# EAGLE board spin (EAGLE 6.3)
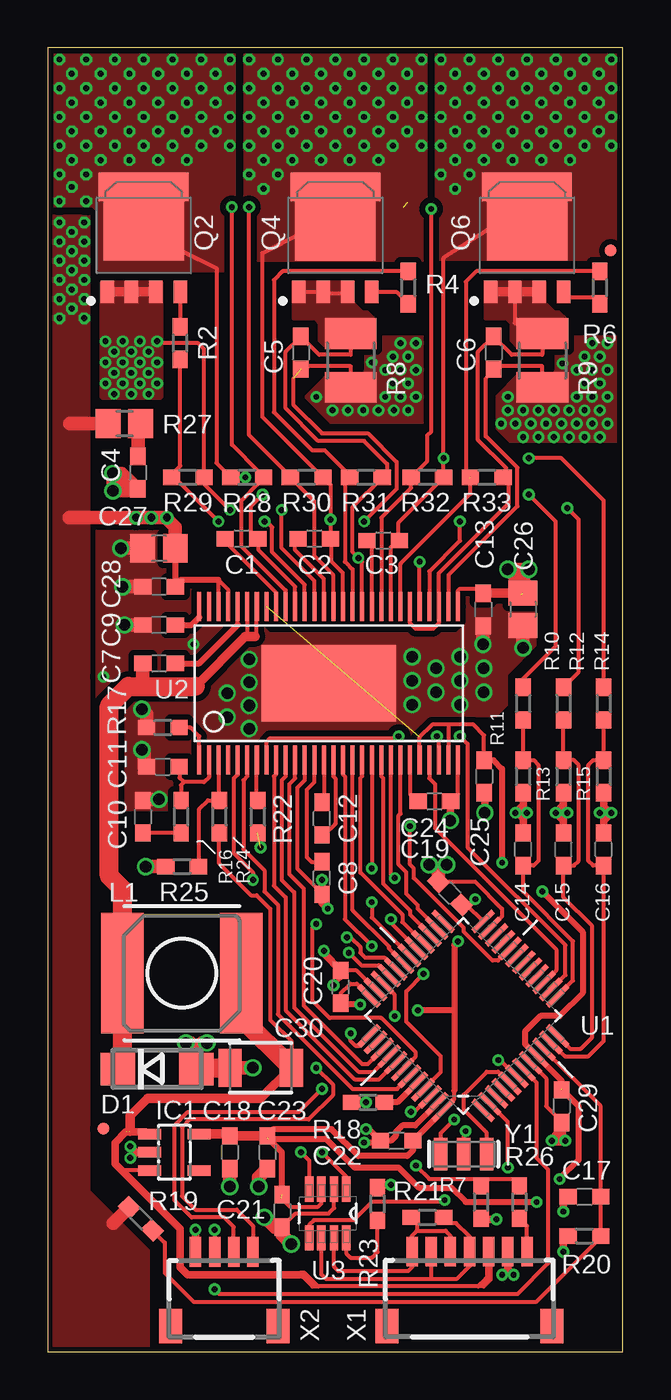
[diagram p0: board, top side]
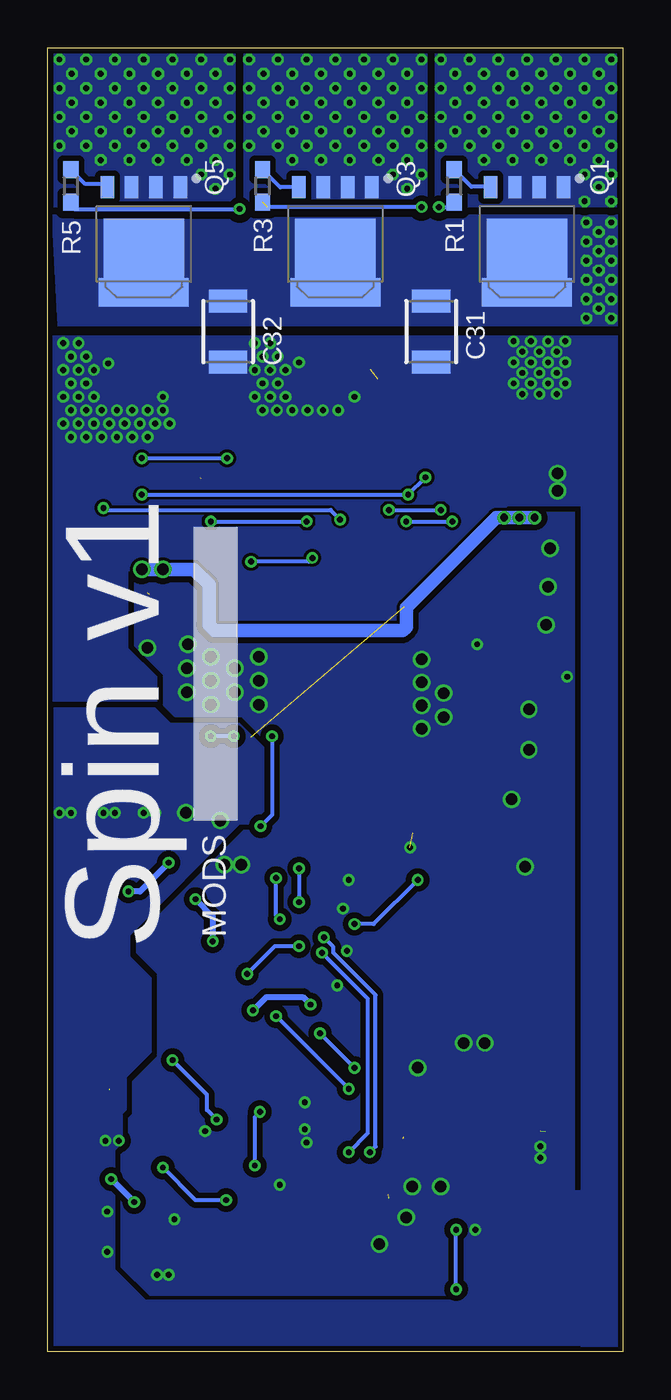
[diagram p1: board, bottom side, seen from below]

Size 30 x 68 mm. Coordinates in mm from the lower left corner, seen from the top.
Outline: 0,0 30,0 30,68 0,68 0,0
Copper layers (1*16): Top 0.035mm / dielectric 1.5mm / Bottom 0.035mm
Design rules "Fusion_eagle_rule_v1.1 *": minimum track width 6mil, minimum drill 12mil, track to track 6mil, track to pad 6mil, pad to pad 6mil, via to via 6mil, smd to smd 0mil, copper to edge 10mil, drill to drill 10mil, minimum pad ring 10mil, minimum via ring 6mil, stop-mask expansion 2mil, vias tented up to drill 100mil, thermal gap 10mil
Net classes: 1 HVPWR: clearance 0.4 mm
tRestrict: area 12.3,46.2 to 20.1,52.3; area 22.2,46.2 to 30,52.3
bRestrict: area 16.1,42.9 to 21.9,43.8; area 9.1,43.4 to 12.7,44.4

## Footprints (pad centres in the part's own frame; a part is rotated, then mirrored left to right if it is on the bottom)
C0603 = smd 0.9 x 0.8: 1 -0.85,0; 2 0.85,0
C0805 = smd 1.3 x 1.5: 1 -0.85,0; 2 0.85,0
1210 = smd 1.2 x 2: 1 -1.6,0; 2 1.6,0
SMA = smd 1.8 x 1.7: A 2.05,0; C -2.05,0
SOT23-5L = smd 0.55 x 1.2: 1 -0.95,-1.3; 2 0,-1.3; 3 0.95,-1.3; 4 0.95,1.3; 5 -0.95,1.3
MICRO-FIDUCIAL = smd 0.635 x 0.635: 1 0,0
NR6028 = smd 6.3 x 2.2: 1 0,3.1; 2 0,-3.1
POWER-SO8-UNIVERSAL = smd 1.15 x 0.7: 1 -2.725,1.905; 2 -2.725,0.635; 3 -2.725,-0.635; 4 -2.725,-1.905 | smd 3.6 x 4.2: 5 0.7,0 | smd 1.5 x 4.7: 6 2.75,0
R0603 = smd 0.9 x 0.8: 1 -0.85,0; 2 0.85,0
R1210 = smd 1.6 x 2.7: 1 -1.4,0; 2 1.4,0
R0805 = smd 1.3 x 1.5: 1 -0.85,0; 2 0.85,0
QFP50P900X900X160-48N = smd 1.473 x 0.279: 1 -4.216,2.743; 2 -4.216,2.261; 3 -4.216,1.753; 4 -4.216,1.245; 5 -4.216,0.762; 6 -4.216,0.254; 7 -4.216,-0.254; 8 -4.216,-0.762; 9 -4.216,-1.245; 10 -4.216,-1.753; 11 -4.216,-2.261; 12 -4.216,-2.743; 25 4.216,-2.743; 26 4.216,-2.261; 27 4.216,-1.753; 28 4.216,-1.245; 29 4.216,-0.762; 30 4.216,-0.254; 31 4.216,0.254; 32 4.216,0.762; 33 4.216,1.245; 34 4.216,1.753; 35 4.216,2.261; 36 4.216,2.743 | smd 0.279 x 1.473: 13 -2.743,-4.216; 14 -2.261,-4.216; 15 -1.753,-4.216; 16 -1.245,-4.216; 17 -0.762,-4.216; 18 -0.254,-4.216; 19 0.254,-4.216; 20 0.762,-4.216; 21 1.245,-4.216; 22 1.753,-4.216; 23 2.261,-4.216; 24 2.743,-4.216; 37 2.743,4.216; 38 2.261,4.216; 39 1.753,4.216; 40 1.245,4.216; 41 0.762,4.216; 42 0.254,4.216; 43 -0.254,4.216; 44 -0.762,4.216; 45 -1.245,4.216; 46 -1.753,4.216; 47 -2.261,4.216; 48 -2.743,4.216
TSSOP56P = smd 1.5 x 0.21: 1 -4,6.75; 2 -4,6.25; 3 -4,5.75; 4 -4,5.25; 5 -4,4.75; 6 -4,4.25; 7 -4,3.75; 8 -4,3.25; 9 -4,2.75; 10 -4,2.25; 11 -4,1.75; 12 -4,1.25; 13 -4,0.75; 14 -4,0.25; 15 -4,-0.25; 16 -4,-0.75; 17 -4,-1.25; 18 -4,-1.75; 19 -4,-2.25; 20 -4,-2.75; 21 -4,-3.25; 22 -4,-3.75; 23 -4,-4.25; 24 -4,-4.75; 25 -4,-5.25; 26 -4,-5.75; 27 -4,-6.25; 28 -4,-6.75; 29 4,-6.75; 30 4,-6.25; 31 4,-5.75; 32 4,-5.25; 33 4,-4.75; 34 4,-4.25; 35 4,-3.75; 36 4,-3.25; 37 4,-2.75; 38 4,-2.25; 39 4,-1.75; 40 4,-1.25; 41 4,-0.75; 42 4,-0.25; 43 4,0.25; 44 4,0.75; 45 4,1.25; 46 4,1.75; 47 4,2.25; 48 4,2.75; 49 4,3.25; 50 4,3.75; 51 4,4.25; 52 4,4.75; 53 4,5.25; 54 4,5.75; 55 4,6.25; 56 4,6.75 | smd 4 x 7: 57 0,0
SOT65P280X145-8N = smd 1.321 x 0.432: 1 -1.27,0.965; 2 -1.27,0.33; 3 -1.27,-0.33; 4 -1.27,-0.965; 5 1.27,-0.965; 6 1.27,-0.33; 7 1.27,0.33; 8 1.27,0.965
SM07B-SRSS-TB = smd 0.6 x 1.55: 1 -3,2.975; 2 -2,2.975; 3 -1,2.975; 4 0,2.975; 5 1,2.975; 6 2,2.975; 7 3,2.975 | smd 1.2 x 1.8: FIT@1 -4.3,-0.9; FIT@2 4.3,-0.9
SM04B-SRSS-TB = smd 0.6 x 1.55: 1 -1.5,2.975; 2 -0.5,2.975; 3 0.5,2.975; 4 1.5,2.975 | smd 1.2 x 1.8: FIT@1 -2.8,-0.9; FIT@2 2.8,-0.9
RESONATOR-SMD = smd 0.7 x 1.7: 1 -1.2,0; 2 0,0; 3 1.2,0

## Placement (x,y rotation side)
C1  100n  [C0603]  10.1,42.4 0 top
C2  100n  [C0603]  13.9,42.4 0 top
C3  100n  [C0603]  17.5,42.3 0 top
C4  10n  [C0603]  4.7,45.85 270 top
C5  1n  [C0603]  13.2,52.1 270 top
C6  1n  [C0603]  23.25,52.1 270 top
C7  100n  [C0603]  5.8,35.9 180 top
C8  2u2  [C0603]  14.3,24.7 90 top
C9  15n  [C0603]  5.8,37.9 180 top
C10  6n8  [C0603]  4.95,27.9 270 top
C11  120p  [C0603]  6,30.5 0 top
C12  22n  [C0603]  14.3,27.8 90 top
C13  100n  [C0603]  22.71,38.7 270 top
C14  2n2  [C0603]  24.8,26.2 90 top
C15  2n2  [C0603]  26.9,26.2 90 top
C16  2n2  [C0603]  29,26.2 90 top
C17  100n  [C0603]  28,8.08 180 top
C18  2u2  [C0603]  9.49,10.4 270 top
C19  100n  [C0603]  20.98,23.91 135 top
C20  100n  [C0603]  15.28,19.03 90 top
C21  100n  [C0603]  12.22,7.34 270 top
C22  100n  [C0603]  18.2,11 180 top
C23  100n  [C0603]  11.45,10.4 270 top
C24  1u  [C0603]  20.17,28.7 180 top
C25  1u  [C0603]  22.76,30 270 top
C26  4u7  [C0805]  24.79,38.72 270 top
C27  4u7  [C0805]  5.8,41.9 180 top
C28  100n  [C0603]  5.8,39.9 180 top
C29  1u  [C0603]  26.8,12.8 270 top
C30  47u  [1210]  11.1,14.8 180 top
C31  10u  [1210]  10,53.2 270 bottom
C32  10u  [1210]  20.6,53.2 270 bottom
D1  STPS1H100AF  [SMA]  5.7,14.73 0 top
IC1  MCP1824MCP1824T-3302E/OT  [SOT23-5L]  6.6,10.4 270 top
JP1  FIDUCIALUFIDUCIAL  [MICRO-FIDUCIAL]  2.9,11.63 0 top
JP2  FIDUCIALUFIDUCIAL  [MICRO-FIDUCIAL]  29.36,57.43 0 top
L1  10u  [NR6028]  6.99,19.74 90 top
Q1  PSMN7R0-60YS  [POWER-SO8-UNIVERSAL]  5,58 270 bottom
Q2  PSMN7R0-60YS  [POWER-SO8-UNIVERSAL]  5,58 90 top
Q3  PSMN7R0-60YS  [POWER-SO8-UNIVERSAL]  15,58 270 bottom
Q4  PSMN7R0-60YS  [POWER-SO8-UNIVERSAL]  15,58 90 top
Q5  PSMN7R0-60YS  [POWER-SO8-UNIVERSAL]  25,58 270 bottom
Q6  PSMN7R0-60YS  [POWER-SO8-UNIVERSAL]  25,58 90 top
R1  10R  [R0603]  8.8,60.8 90 bottom
R2  10R  [R0603]  6.9,52.6 90 top
R3  10R  [R0603]  18.8,60.8 90 bottom
R4  10R  [R0603]  18.8,55.5 270 top
R5  10R  [R0603]  28.8,60.8 90 bottom
R6  10R  [R0603]  28.8,55.5 270 top
R7  2K2  [R0603]  22.6,7.8 90 top
R8  R001  [R1210]  15.8,51.7 270 top
R9  R001  [R1210]  25.8,51.7 270 top
R10  56K  [R0603]  24.8,33.8 270 top
R11  3K9  [R0603]  24.8,30 90 top
R12  56K  [R0603]  26.9,33.8 270 top
R13  3K9  [R0603]  26.9,30 90 top
R14  56K  [R0603]  29,33.8 270 top
R15  3K9  [R0603]  29,30 90 top
R16  10K  [R0603]  6.95,27.9 270 top
R17  205K  [R0603]  6,32.55 180 top
R18  10K  [R0603]  16.7,13 180 top
R19  56K  [R0603]  4.85,6.93 135 top
R20  3K9  [R0603]  28,6.03 0 top
R21  DNF  [R0603]  19.8,7 0 top
R22  0R  [R0603]  10.95,27.9 270 top
R23  0R  [R0603]  17.2,7.7 90 top
R24  53K6  [R0603]  8.95,27.9 90 top
R25  10K  [R0603]  7,25.3 0 top
R26  1K8  [R0603]  24.6,7.8 270 top
R27  3R3  [R0805]  4,48.4 180 top
R28  100K  [R0603]  10.4,45.6 0 top
R29  100K  [R0603]  7.3,45.6 180 top
R30  100K  [R0603]  13.5,45.6 180 top
R31  100K  [R0603]  16.6,45.6 180 top
R32  100K  [R0603]  19.8,45.6 180 top
R33  100K  [R0603]  22.9,45.6 180 top
U1  STM32F103CBT6  [QFP50P900X900X160-48N]  21.67,17.51 135 top
U2  DRV8301DCA  [TSSOP56P]  14.65,34.86 90 top
U3  MAX3051EKA  [SOT65P280X145-8N]  14.6,7.2 270 top
X1  SM07B-SRSS-TB  [SM07B-SRSS-TB]  22,2.24 0 top
X2  SM04B-SRSS-TB  [SM04B-SRSS-TB]  9.2,2.23 0 top
Y1  RESONATORSMD  [RESONATOR-SMD]  21.7,10.3 0 top

## Library data of the parts
C1-C29 D1 IC1 JP1 JP2 L1 Q1-Q6 R1-R33 U2 X1 X2 Y1 = FOC ESC
C30-C32 = SparkFun
U1 = FOC ESC; MPN: STM32F103CBT6; OC_FARNELL: 1606327; OC_NEWARK: 11N8296; PACKAGE: QFP-48; SUPPLIER: STMICROELECTRONICS
U3 = FOC ESC; MPN: MAX3051EKA; OC_FARNELL: -; OC_NEWARK: 07R7042; PACKAGE: SOT-23-8; SUPPLIER: Maxim

## Nets
+3V3: C18.1 C19.1 C20.1 C21.1 C22.1 C23.1 C25.1 C29.1 IC1.5 U1.9 U1.24 U1.36 U1.48 U2.24 U2.27 U2.49 U3.3
+5V: C30.1 IC1.1 IC1.3 L1.2 R24.1 X1.5
A_HI: U1.31 U2.17
A_LO: U1.28 U2.18
B_HI: U1.30 U2.19
B_LO: U1.27 U2.20
C_HI: U1.29 U2.21
C_LO: U1.26 U2.22
CAN_H: R21.1 U3.7 X1.1 X1.3
CAN_L: R21.2 U3.6 X1.2 X1.4
CAN_RX: U1.32 U3.4
CAN_SHDN: U1.2 U3.5
CAN_TX: U1.33 U3.1
GND: C8.1 C9.2 C10.1 C11.1 C13.2 C18.2 C19.2 C20.2 C21.2 C22.2 C23.2 C26.2 C27.2 C28.2 C30.2 D1.A IC1.2 R7.1 R17.2 R18.2 R22.2 R23.2 R25.1 U1.23 U1.35 U1.47 U2.12 U2.57 U3.2 X1.6 X2.1 Y1.2
GNDA: C14.2 C15.2 C16.2 C17.2 C24.1 C25.2 C29.2 R11.1 R13.1 R15.1 R20.1 U1.8 U2.28
I_B_SENSE: U1.15 U2.25
I_C_SENSE: U1.14 U2.26
N$1: Q1.4 R1.2
N$2: Q2.4 R2.2
N$3: Q3.4 R3.2
N$5: Q6.4 R6.2
N$6: Q5.4 R5.2
N$7: C3.2 Q5.1 Q5.2 Q5.3 Q6.5 Q6.6 R14.1 R32.1 U2.36
N$8: C2.2 Q3.1 Q3.2 Q3.3 Q4.5 Q4.6 R12.1 R30.1 U2.41
N$9: C1.2 Q1.1 Q1.2 Q1.3 Q2.5 Q2.6 R10.1 R28.1 U2.46
N$10: R4.1 R31.2 U2.40
N$11: R3.1 R30.2 U2.42
N$12: R5.1 R32.2 U2.37
N$13: R6.1 R33.2 U2.35
N$16: R1.1 R28.2 U2.47
N$17: C7.1 U2.52
N$18: R2.1 R29.2 U2.45
N$19: R26.2 X1.7
N$20: C7.2 D1.C L1.1 U2.50 U2.51
N$21: C1.1 U2.48
N$22: C2.1 U2.43
N$23: C3.1 U2.38
N$25: C11.2 R16.1 U2.2
N$26: R17.1 U2.1
N$28: R18.1 U1.44
N$29: C8.2 U2.13
N$31: R23.1 U3.8
N$32: C12.2 U2.14
N$33: C12.1 U2.15
N$34: C10.2 R16.2
N$35: C24.2 U2.23
N$36: U1.39 U2.11
N$37: C9.1 U2.56
N$38: R22.1 U2.7
N$39: R24.2 R25.2 U2.3
N$40: U1.40 U2.10
N$41: U1.41 U2.9
N$42: U1.42 U2.5
N$43: U1.43 U2.6
N$44: U1.45 U2.16
N$130: U1.6 Y1.1
N$131: U1.5 Y1.3
N$132: C4.1 R27.1
NRST: U1.7 X2.2
PGND: C4.2 C5.2 C6.2 C31.2 C32.2 Q2.1 Q2.2 Q2.3 R8.2 R9.2 R29.1 U2.30 U2.32 U2.44
PWM_IN: R7.2 R26.1 U1.46
PWR [HVPWR]: C13.1 C26.1 C27.1 C28.1 C31.1 C32.1 Q1.5 Q1.6 Q3.5 Q3.6 Q5.5 Q5.6 R19.2 R27.2 U2.29 U2.53 U2.54
Q4: Q4.4 R4.2
SN1: C5.1 Q4.1 Q4.2 Q4.3 R8.1 R31.1 U2.33 U2.39
SN2: C6.1 Q6.1 Q6.2 Q6.3 R9.1 R33.1 U2.31 U2.34
SPI_!CS: U1.20 U2.8
SWDCLK: U1.37 X2.4
SWDIO: U1.34 X2.3
V_A_SENSE: C14.1 R10.2 R11.2 U1.13
V_B_SENSE: C15.1 R12.2 R13.2 U1.12
V_BUS_SENSE: C17.1 R19.1 R20.2 U1.10
V_C_SENSE: C16.1 R14.2 R15.2 U1.11

## Tracks (layer width: path | path; a pad name or v marks a point on that pad's centre or on a via)
+3V3  (via drill 0.3 pad 0.15)  (4 unrouted)
  Top 0.2: U2.24 19.4,32.05 20.05,32.7 20.9,32.7 | 20.9,32.7 U2.27 | C25.1 22.76,32.15 22.21,32.7 20.9,32.7 | U1.24 21.83,23.31 C19.1 | 12.2,8 12.64,7.56 14.1,7.56 14.27,7.73 U3.3 | 20.63,12.58 U1.48 21.2,13.16 21.2,13.6 | C20.1 15.28,18.68 15.78,19.18 16.12,19.18 U1.36
  Top 0.3: C29.1 26.8,14.14 U1.9 24.9,16.04 24.9,16.7 25.7,17.5 26.7,17.5 27.9,18.7 27.9,21.9 v25.8,24 | C21.1 12.2,8.25 12.2,10.42 11.45,11.17 C23.1 11.75,11.6 14.8,11.6 16.2,10.2 18.75,10.2 19.05,10.5 C22.1 20.63,12.58 | v21.4,21.4 21.2,21.2 21.2,17.8 | 21.2,17.8 21.2,13.6 | C25.1 23.25,30.85 23.7,30.4 v23.7,25.5 | 21.2,17.8 v19.3,17.8 | v16.3,18.1 15.36,18.1 C20.1 | 11.5,11.1 14.5,11.1 16,9.6 18.3,9.6 19.35,8.55 21.05,8.55 21.8,7.8 v25.5,7.8 | v26.7,9 27.7,10 27.7,12.8 26.8,13.7 | v22.3,23.6 22.01,23.31 C19.1
  Top 0.5: IC1.5 9.35,11.35 C18.1 C23.1
  Bottom 0.3: v22.3,23.6 21.4,22.7 v21.4,21.4 | v19.3,17.8 18.6,18.5 16.7,18.5 v16.3,18.1 | v25.5,7.8 v26.7,9 | v23.7,25.5 25.2,24 v25.8,24
+5V  (1 unrouted)
  Top 0.2: R24.1 8.91,26.99 8.91,25.49 10.6,23.8 10.9,23.8 11.6,23.1 11.6,17.3 12.7,16.2 C30.1 | 23,3.8 22.85,3.8 22.45,3.4 | 22.45,3.4 14.1,3.4 | 14.1,3.4 14,3.4 | 14,3.4 13.9,3.4 | 13.9,3.4 13.3,4 | 13.9,3.4 13.8,3.4 13.3,3.9 | 13.7,3.7 14,3.4 | 14.1,3.4 13.4,4.1 13.15,4.1 | 22.45,3.4 22.75,3.4 23.1,3.75 22.7,3.5 | 4.3,11.5 4.4,11.4 | IC1.3 3.95,9.45 3.9,9.4
  Top 0.4: X1.5 23,3.8 | 13.3,4 7.3,4 6.9,4.4 6.9,6.4 3.9,9.4 3.5,9.8 3.5,10.9 4.05,11.45 5.1,11.45 IC1.1
  Top 0.5: C30.1 11.1,13.2 5.2,13.2 4.3,12.3 4.3,11.5
  Top 1: C30.1 10.09,17.41 L1.2
A_HI
  Top 0.2: U1.31 17.8,21.02 17.8,21.12 15.9,23.02 U2.17
A_LO
  Top 0.2: U2.18 16.4,30 16.3,29.9 16.3,24.99 18.5,22.79 18.5,22.4 19.53,21.37 U1.28
B_HI  (via drill 0.3 pad 0.15)
  Top 0.2: U2.19 v16.9,25.2 | v16.9,23.44 16.9,22.64 U1.30
  Bottom 0.2: v16.9,25.2 v16.9,23.44
B_LO
  Top 0.2: U2.20 17.4,30 17.5,29.9 17.5,24.4 18.9,23 18.9,22.8 19.93,21.77 U1.27
C_HI  (via drill 0.3 pad 0.15)
  Top 0.2: U1.29 17.9,22.36 v17.9,22.56 | v18.1,24.7 17.9,24.9 U2.21
  Bottom 0.2: v18.1,24.7 18.1,22.76 v17.9,22.56
C_LO
  Top 0.2: U2.22 18.4,28.06 18.3,27.96 18.3,25.4 18.7,25 18.7,23.88 19.3,23.28 19.3,23.1 20.29,22.11 U1.26
CAN_H
  Top 0.2: 19.25,6.3 19,6.05 X1.1 19,4.4 18.8,4.2 15.15,4.2 14.93,4.42 U3.7 | 19.25,6.3 19.25,6.7 18.9,6.95 arc-90 R21.1 | 19.25,6.3 20.75,6.3 21,6.05 X1.3
CAN_L
  Top 0.2: 20,3.8 14.49,3.8 14.27,4.02 U3.6 | 20,3.8 21.35,3.8 22,4.45 X1.4 22,6 21.3,6.7 21,6.7 20.7,7 R21.2 | 20,3.8 X1.2
CAN_RX  (via drill 0.3 pad 0.15)
  Top 0.2: v13.2,10.4 13.63,9.96 U3.4 | v15.6,21.6 15.8,21.6 16.3,21.1 16.3,20.8 16.55,20.55 17.55,20.55 U1.32
  Bottom 0.2: v13.2,10.4 12.9,10.7 12.9,18.6 15.1,20.8 15.1,21.1 v15.6,21.6
CAN_SHDN  (via drill 0.3 pad 0.15)
  Top 0.2: U3.5 13.63,6.6 13.88,6.85 15.95,6.85 16.9,7.8 20.6,7.8 v20.7,7.9 | v24,9.6 24,11.98 U1.2
  Bottom 0.2: v20.7,7.9 22.3,7.9 v24,9.6
CAN_TX  (via drill 0.3 pad 0.15)
  Top 0.2: U3.1 15.56,9.13 v14.3,10.4 | v15.7,20.8 16.35,20.15 17.27,20.15 U1.33
  Bottom 0.2: v14.3,10.4 13.3,11.4 13.3,18.4 v15.7,20.8
GND  (via drill 0.3, 0.3 pad 0.15, 0.6 pad 0.15)  (1 unrouted)
  Top 0.2: 23.05,22.15 U1.23 23.09,22.09 23.7,22.7 23.7,23.1 22.29,24.51 C19.2 | 5.01,30.47 C11.1 | 5.08,29.1 4.93,28.85 C10.1 | U2.12 13.4,29.8 13,29.4 13,25.21 14.3,23.91 C8.1 | U1.35 16.1,19.88 C20.2 15.28,19.48 v14.9,19.1 | C21.2 12.92,7.2 14.64,7.2 14.93,7.49 U3.2 | R18.2 v16.6,13 | C22.2 17.15,10.9 | Y1.2 21.7,11.4 v21.8,11.5 | 14.4,20.76 v14.4,20.9
  Top 0.3: U1.47 19.16,11.8 18.5,11.8 18.15,11.45 18.15,11.25 17.9,11 C22.2 16.65,11.7 v16.6,11.6 | 17.15,10.9 v16.5,10.9
  Top 0.4: C20.2 14.4,20.76 | 4.6,10.4 v4.3,10.1 | IC1.2 4.6,10.4 | 4.6,10.4 v4.3,10.7 | 7.7,4.91 X2.1 v7.7,6.35 | 24,4.3 v24.3,4 | X1.6 24,4.3 | 24,4.3 v23.7,4 | R7.1 22.65,6.9 v23.4,6.9 | R23.2 17.55,8.7 v17.9,8.7 | v14.3,24.6 C8.1 14.3,23.4 v14.6,23.1
  Top 0.5: C13.2 22.73,37.87
  Top 0.7: 7.75,15.8 7.45,16.1 v7.2,16.1 | 7.75,15.8 D1.A 7.82,14.8 C30.2 v10.7,14.8 | 7.75,15.8 8.05,16.1 v8.3,16.1 | C19.2 20.38,25.2 | 20.38,25.2 19.88,25.4 v19.9,25.4 | 20.38,25.2 20.78,25.3 v20.8,25.4 | C18.2 v9.49,8.61 v9.5,8.6 | C23.2 11,9.1 v11,8.6 | v12.7,5.6 12.22,6.08 C21.2 11.86,6.49 v11.3,7 | C10.1 5,28.8 v5.8,28.8 | 5.01,30.47 5.01,31.29 v4.9,31.4 | R17.2 5.15,33.25 v4.9,33.5 | C9.2 v4,37.9 | v3.9,39.9 C28.2 | C13.2 v22.71,36.91 v22.7,36.9 | C26.2 v24.79,36.71 v24.8,36.7 | R25.1 v5.1,25.3 | v3.8,41.9 C27.2
  Top 1: D1.A 7.78,14.8 C30.2
  other vias: 11.1,26.3 19,36.25 19,35 19,33.75 20.25,34.4 20.25,35.65 21.5,36.25 21.5,35 21.5,33.75 10.5,33.7 10.5,34.9 10.5,36.1 9.35,34.35 9.35,33.1 22.75,34.4 22.75,35.65 10.5,32.5 7.6,36.9 2.9,35.2
  pour Bottom (isolate 0.3): 2.5,43.8 2.5,8.4 0.2,8.4 0.2,2.9 24.7,2.9 26.2,4.4 26.2,10.3 25.8,10.7 25.8,12.2 25.6,12.4 25.6,14.1 24.3,15.4 24.3,19.7 25.4,20.8 25.4,21.6 19.8,27.2 19.2,27.2 18.5,27.9 18.5,31.7 19.9,33.1 23.4,33.1 24,33.7 24,35.3 25.5,36.8 25.5,40.7 22.5,40.7 21.7,39.9 21.7,37.9 21.3,37.5 11.6,37.5 11.2,37.9 11.2,38.9 6.2,43.8
  pour Top (isolate 0.3, no thermals): 2.5,43.8 2.5,28.2 18.5,28.2 18.5,31.7 19.9,33.1 23.4,33.1 24,33.7 24,35.3 25.5,36.8 25.5,40.7 22.5,40.7 21.7,39.9 21.7,37.9 21.3,37.5 11.6,37.5 11.2,37.9 11.2,38.9 6.2,43.8
GNDA  (via drill 0.3 pad 0.15, 0.6 pad 0.15)
  Top 0.2: U1.8 26,14.26 26,12.8 26.8,12 C29.2 | C24.1 21.4,29.08 U2.28 | R11.1 C14.2 | C15.2 26.9,27.1 R13.1 | C16.2 29,29.1 R15.1
  Top 0.4: C17.2 26.9,7.73 v26.9,7.3 | R20.1 26.9,5.78 v26.9,5.2 | 24.8,28.5 24.8,28.3 v25,28.1 24.8,27.9 C14.2 24.8,27.8 24.5,28.1 v24.4,28.1 24.8,28.5 | 24.8,28.5 24.8,29.2 | 26.9,27.7 v26.5,28.1 26.9,28.5 R13.1 26.9,28.3 v27.1,28.1 26.9,27.9 26.9,27.7 | 26.9,27.7 26.9,27.1 | 29,28.4 29,28.3 v28.8,28.1 29,27.9 C16.2 29,27.7 v29.4,28.1 29.3,28.1 29,28.4 | 29,29.1 29,28.4 | v21,27.7 21,28.68 C24.1 | v22.8,28.1 22.8,29.09 C25.2
  Top 0.5: C29.2 26.8,11.3 v27,11 v26.3,11 26.7,11.4 26.7,11.9
  pour Bottom (isolate 0.3): 29.8,33.6 24.4,33.6 23.6,32.8 20,32.8 18.7,31.5 18.7,28.1 19.3,27.5 20,27.5 25.7,21.7 25.7,20.6 24.6,19.5 24.6,15.6 25.9,14.3 25.9,12.6 26.1,12.4 26.1,10.9 26.5,10.5 26.5,4.3 24.9,2.7 8.6,2.7 8.4,2.9 0.2,2.9 0.2,0.2 29.8,0.2
I_B_SENSE
  Top 0.2: U2.25 19.9,29.9 20.2,29.6 20.2,27.3 26.55,20.95 26.55,19.91 U1.15
I_C_SENSE  (via drill 0.3 pad 0.15)
  Top 0.2: U2.26 20.4,32 v20.3,32.1 | v21.5,32.1 21.9,31.7 21.9,26.3 27,21.2 27,19.64 U1.14
  Bottom 0.2: v20.3,32.1 v21.5,32.1
N$1
  Bottom 0.2: 8.8,61.7 R1.2 7.9,60.75 6.93,60.75
  Bottom 0.7: Q1.4 6.93,60.75
N$2
  Top 0.2: Q2.4 R2.2
N$3
  Bottom 0.2: 18.77,61.62 R3.2 17.88,60.73 Q3.4
N$5
  Top 0.2: Q6.4 26.9,55 28.45,55 R6.2
N$6
  Bottom 0.2: 26.91,60.9 28.05,60.9 R5.2
  Bottom 0.7: Q5.4 26.91,60.9
N$7  (via drill 0.3 pad 0.15, 0.3 pad 0.3)
  Top 0.2: U2.36 17.9,41.95 18.2,42.25 C3.2 18.3,42.35 18.3,43.25 R32.1 v20.65,46.6 20.65,57.05 23.4,58.8 24.9,58.8 Q6.5 | R14.1 29,44.4 26.8,46.6 v25.1,46.6
  Bottom 0.2: v25.1,46.6 v20.65,46.6
  other vias: 21.25,62.15 20.5,62.9 21.25,63.65 20.5,64.4 22,64.4 23.5,64.4 22.75,63.65 22.75,62.15 25,64.4 22,62.9 24.25,62.15 25,62.9 23.5,62.9 24.25,63.65 29.4,64.4 29.4,62.9 28.75,63.65 28,64.4 28,62.9 27.25,62.15 25.75,62.15 26.5,62.9 27.25,63.65 26.5,64.4 25.75,63.65 20.5,61.4 22,61.4 21.25,60.65 21.25,66.65 20.5,67.4 22,67.4 22.75,66.65 23.5,67.4 24.25,66.65 25,67.4 29.4,67.4 28.75,66.65 25.75,66.65 27.25,66.65 26.5,67.4 28,67.4 21.25,65.15 20.5,65.9 22,65.9 22.75,65.15 23.5,65.9 24.25,65.15 25,65.9 29.4,65.9 28.75,65.15 25.75,65.15 27.25,65.15 26.5,65.9 28,65.9
  pour Top (isolate 0.3, no thermals): 20.2,56.9 29.8,56.9 29.8,67.8 20.2,67.8
  pour Bottom (isolate 0.3, no thermals): 20.2,59.7 29.8,59.7 29.8,67.8 20.2,67.8
N$8  (via drill 0.3 pad 0.15, 0.3 pad 0.3)
  Top 0.2: U2.41 15.39,40.61 14.8,41.2 14.8,42.35 C2.2 | C2.2 14.85,42.5 | Q4.5 13.9,58.7 11.2,57.3 11.2,48.75 R30.1 | 14.55,45.6 R30.1 | R30.1 14.75,45.2 v14.75,43.4 C2.2 | R12.1 27.7,35.45 27.7,43.4 v27.1,44
  Bottom 0.2: v27.1,44 27,43.9 15.25,43.9 v14.75,43.4
  other vias: 15,62.9 14.25,62.15 10.5,64.4 11.25,63.65 12,64.4 10.5,62.9 11.25,62.15 12,62.9 12.75,62.15 13.5,62.9 14.25,63.65 15,64.4 13.5,64.4 12.75,63.65 17.25,62.15 15.75,62.15 16.5,62.9 17.25,63.65 18,62.9 18.75,63.65 18,64.4 16.5,64.4 15.75,63.65 19.5,64.4 19.5,62.9 11.25,60.65 10.5,61.4 12,61.4 11.25,65.15 10.5,65.9 12,65.9 12.75,65.15 13.5,65.9 14.25,65.15 15,65.9 19.5,65.9 18.75,65.15 15.75,65.15 17.25,65.15 16.5,65.9 18,65.9 11.25,66.65 10.5,67.4 12,67.4 12.75,66.65 13.5,67.4 14.25,66.65 15,67.4 19.5,67.4 18.75,66.65 15.75,66.65 17.25,66.65 16.5,67.4 18,67.4
  pour Bottom (isolate 0.3, no thermals): 10.2,67.8 10.2,59.7 19.8,59.7 19.8,67.8
  pour Top (isolate 0.3, no thermals): 10.2,67.8 10.2,56.85 19.8,56.85 19.8,67.8
N$9  (via drill 0.3 pad 0.15, 0.3 pad 0.3)
  Top 0.2: Q2.5 7,57.4 8.8,56.5 8.8,46.35 R28.1 v10.3,45.6 | U2.46 12.9,39.9 11,41.8 11,42.35 C1.2 10.6,42.75 10.6,44.1 v11.2,44.7 | R10.1 24.8,35.1 26.5,36.8 26.5,43.3 v25.1,44.7
  Bottom 0.2: v10.3,45.6 v11.2,44.7 v25.1,44.7
  other vias: 0.6,60 1.25,60.75 2,60 0.6,61.4 0.6,62.9 1.25,62.15 2,61.4 2.75,62.15 2,62.9 1.25,63.65 0.6,64.4 2,64.4 4.25,62.15 3.5,62.9 2.75,63.65 3.5,64.4 5,62.9 4.25,63.65 5,64.4 9.5,64.4 8.75,63.65 9.5,62.9 8,62.9 7.25,62.15 6.5,62.9 5.75,63.65 5.75,62.15 7.25,63.65 6.5,64.4 8,64.4 1.25,65.15 0.6,65.9 2,65.9 2.75,65.15 3.5,65.9 4.25,65.15 5,65.9 9.5,65.9 8.75,65.15 5.75,65.15 7.25,65.15 6.5,65.9 8,65.9 1.25,66.65 0.6,67.4 2,67.4 2.75,66.65 3.5,67.4 4.25,66.65 5,67.4 9.5,67.4 8.75,66.65 5.75,66.65 7.25,66.65 6.5,67.4 8,67.4
  pour Top (isolate 0.3, no thermals): 0.2,59.7 0.2,67.8 9.8,67.8 9.8,56.3 2.6,56.3 2.6,59.4 2.3,59.7
  pour Bottom (isolate 0.3, no thermals): 0.2,59.7 0.2,67.8 9.8,67.8 9.8,59.7
N$10
  Top 0.2: U2.40 15.9,40.8 15.5,41.2 15.5,45.35 R31.2 15.75,45.7 14.45,47 13.8,47 11.8,49 11.8,55.9 12.25,56.35 R4.1
N$11  (via drill 0.3 pad 0.15)  (1 unrouted)
  Top 0.2: U2.42 14.9,40.5 13.9,41.5 13.9,44.35 R30.2 12.65,45.65 10.5,47.8 v10.5,59.7
  Bottom 0.2: v10.5,59.7 18.55,59.7
N$12  (via drill 0.3 pad 0.15)
  Top 0.2: U2.37 17.4,43.5 18.95,45.05 R32.2 19.8,46.45 19.8,47.8 20,48 v20,59.6
  Bottom 0.2: R5.1 28.63,59.6 v20,59.6
N$13  (1 unrouted)
  Top 0.2: U2.35 18.4,41.1 22.05,44.75 R33.2 | R6.1 22.35,56.35 21.8,55.8 21.8,45.8 22,45.55
N$16  (via drill 0.3 pad 0.15)
  Top 0.2: U2.47 12.4,39.7 10.1,42 10.1,44.4 11,45.3 11.3,45.55 R28.2 11.3,45.75 11.05,45.85 9.6,47.3 v9.6,59.7
  Bottom 0.2: v9.6,59.7 8.65,59.7 R1.1
N$17
  Top 0.2: 9.9,37.9 U2.52
  Top 0.3: C7.1 7.9,35.9 9.9,37.9
N$18  (via drill 0.3 pad 0.3)
  Top 0.2: U2.45 13.4,40 11.7,41.7 11.7,43 11.4,43.3 v11.3,43.3 | v8.9,43.3 6.6,45.6 R29.2 6.3,45.6 6.9,46.2 R2.1
  Bottom 0.2: v11.3,43.3 v8.9,43.3
N$19
  Top 0.2: X1.7 25,6.55 R26.2
N$20
  Top 0.2: 10.9,37.3 U2.50 | U2.51 10.4,37.4
  Top 0.3: 10.8,37.3 10.9,37.3 | 10.4,37.4 10.3,37.3
  Top 0.5: 7.7,34.7 10.3,37.3 10.8,37.3
  Top 0.7: C7.2 4.95,34.7
  Top 1: D1.C 3.89,15.27 L1.1 3.89,24.11 3.2,24.8 3.2,33.7 4.2,34.7 4.95,34.7 7.7,34.7
N$21
  Top 0.2: C1.1 9.2,42.35 9.2,42.3 11.9,39.6 U2.48
N$22
  Top 0.2: U2.43 14.4,40.3 12.9,41.8 12.9,42.25 C2.1
N$23
  Top 0.2: U2.38 16.9,42.08 C3.1
N$25
  Top 0.2: C11.2 6.87,30.31 6.87,29.93 7.1,29.7 | U2.2 8.4,29.95 8.15,29.7 7.1,29.7 | 7.1,29.7 6.95,29.55 R16.1
N$26
  Top 0.2: U2.1 7.9,32.1 7.45,32.55 R17.1
N$28
  Top 0.3: U1.44 18.24,13 R18.1
N$29
  Top 0.2: C8.2 13.75,25.55 13.5,25.8 13.5,29.3 13.9,29.7 U2.13
N$31
  Top 0.2: U3.8 15.56,5.13 15.8,4.9 16.9,4.9 17.2,5.2 R23.1
N$32
  Top 0.2: U2.14 14.4,28.93 C12.2
N$33
  Top 0.2: U2.15 14.9,30 15,29.9 15,27.53 14.42,26.95 C12.1
N$34
  Top 0.2: R16.2 C10.2
N$35
  Top 0.2: U2.23 18.9,29.07 C24.2
N$36
  Top 0.2: U1.39 17.45,15.75 16.7,15 16.4,15 13.35,18.05 13.35,24.15 12.6,24.9 12.6,29.6 12.9,29.9 U2.11
N$37
  Top 0.2: 7.9,38.3 U2.56
  Top 0.3: C9.1 7.5,37.9 7.9,38.3
N$38
  Top 0.2: R22.1 10.9,28.97 U2.7
N$39
  Top 0.2: R25.2 7.9,25.45 7.9,28.3 8.35,28.75 R24.2 8.9,28.8 U2.3
N$40
  Top 0.2: U2.10 12.4,30 12.2,29.8 12.2,24.6 12.85,23.95 12.85,17.95 16.2,14.6 17,14.6 U1.40
N$41
  Top 0.2: U2.9 11.9,30.1 11.8,30 11.8,24.3 12.4,23.7 12.4,17.8 16,14.2 17.3,14.2 17.3,14.22 U1.41
N$42  (via drill 0.3 pad 0.15)
  Top 0.2: U1.42 19.2,15.4 19.2,15.6 17.4,17.4 14.7,17.4 13.8,18.3 13.8,22.1 v14,22.3 | U2.5 9.9,30.1 9.7,29.9 9.7,26 10.7,25 v10.7,24.6
  Bottom 0.2: v10.7,24.6 13,22.3 v14,22.3
N$43
  Top 0.2: U2.6 10.4,30 10.2,29.8 10.2,26.2 11.3,25.1 11.3,24 12,23.3 12,17.6 15.9,13.7 18.22,13.7 U1.43
N$44  (via drill 0.3 pad 0.15)
  Top 0.2: U2.16 15.4,30.1 15.5,30 15.5,22.55 v16.9,21.15 | U1.45 20.5,14.58 20.5,15.4 18.7,17.2 18.7,18.8 v19.6,19.7
  Bottom 0.2: v19.6,19.7 18.15,21.15 v16.9,21.15
N$130  (via drill 0.3 pad 0.15)
  Top 0.2: Y1.1 20.5,11.4 v21.2,12.1 | v23.5,15.2 23.62,15.2 U1.6
  Bottom 0.2: v21.2,12.1 21.7,12.6 21.7,13.4 v23.5,15.2
N$131
  Top 0.2: Y1.3 22.9,11.4 21.7,12.6 21.7,13.4 22.9,14.6 23.5,14.6 U1.5
N$132
  Top 0.7: C4.1 4.7,48.55 R27.1
NRST  (via drill 0.3 pad 0.3)
  Top 0.2: U1.7 25.5,14.04 25.5,10.1 26.1,9.5 26.1,4.6 24.5,3 8.95,3 v8.7,3.25 | v8.7,6.35 X2.2
  Bottom 0.2: v8.7,3.25 v8.7,6.35
PGND  (via drill 0.3 pad 0.3, 0.6 pad 0.3)  (1 unrouted)
  Top 0.2: U2.44 13.9,40.2 12.2,41.9 v12.2,43.9 | v9.5,43.9 8.15,45.25 R29.1 8.15,52.3 7.85,52.6 5.8,52.6 v5.7,52.7 | C5.2 13.6,51.4 15.8,51.4 R8.2 | R9.2 25.8,51.4 23.65,51.4 C6.2 22.85,50.75 22.85,47.75 24.5,46.1 24.5,44.1 20.9,40.5 U2.30 | 12.8,50.75 12.8,49.4 14.3,47.9 16.7,47.9 18.2,46.4 18.2,45 v16.5,43.3 | v21.5,43.3 21.5,42.3 19.9,40.7 U2.32
  Top 0.5: Q2.1 Q2.2 Q2.3
  Top 0.7: v3.4,44.9 v3.4,45.8 3.85,45.8 C4.2 4.4,44.9 v3.4,44.9 | v3.4,44.9 3.8,45.3 3.8,45.4
  Bottom 0.2: v12.2,43.9 v9.5,43.9 | v21.5,43.3 v16.5,43.3
  other vias: 3,50.5 3.9,50.5 4.8,50.5 5.7,50.5 3,51.6 3.9,51.6 4.8,51.6 5.7,51.6 4.8,52.7 3.9,52.7 3,52.7 3.45,52.15 4.35,52.15 5.25,52.15 5.25,51.05 4.35,51.05 3.45,51.05 3.45,49.95 4.35,49.95 5.25,49.95 18.4,52.6 17.6,51.2 18.4,51.2 18,51.9 18.8,51.9 18.8,50.5 18.8,49.1 14.85,49.1 15.65,49.1 16.45,49.1 17.25,49.1 18.05,49.1 14,49.8 19.2,49.8 17.6,49.8 18.4,49.8 18,50.5 26.85,51.55 27.6,49.8 28.4,49.8 28,50.5 29.2,51.2 29.2,49.8 29.2,52.6 28,49.1 28.4,52.6 27.6,51.2 28.4,51.2 28,51.9 28.8,51.9 28.8,50.5 28.8,49.1 24.8,49.1 25.6,49.1 26.4,49.1 27.2,49.1 24,49.1 24,49.8 19.2,51.2 24.4,48.4 25.2,48.4 26,48.4 26.8,48.4 27.6,48.4 28.4,48.4 29.2,48.4 28.8,47.7 28,47.7 27.2,47.7 26.4,47.7 25.6,47.7 24.8,47.7 23.65,48.4 16.9,51.6 19.2,52.6
  pour Bottom (no thermals): 29.8,53 0.2,53 0.2,44.1 6,44.1 11.2,38.9 11.2,38 11.6,37.6 21.2,37.6 21.6,38 21.6,40.1 22.3,40.8 24.9,40.8 25.8,40.7 25.8,36.7 24.3,35.2 24.3,33.9 29.8,33.9
  pour Bottom (no thermals): 2.2,53 0.2,53 0.2,0.2 2.2,0.2
  pour Top (no thermals): 2.7,55.75 2.7,49.75 2.8,49.65 5.9,49.65 6,49.75 6,55.75 5.9,55.85 2.8,55.85
  pour Top (isolate 0.3, no thermals): 12.75,53 12.75,45.95 19.95,45.95 20,46 20,52.95 19.95,53 12.8,53
  pour Top (isolate 0.3, no thermals): 22.5,53 22.5,45.95 29.7,45.95 29.75,46 29.75,52.95 29.7,53 22.55,53
PWM_IN  (via drill 0.3 pad 0.15)
  Top 0.2: v18.94,12.5 19.14,12.5 U1.46 | v19.2,9.7 19.9,9 22.25,9 R7.2 22.95,9 24.25,9 R26.1
  Bottom 0.2: v19.2,9.7 19.2,12.24 v18.94,12.5
PWR  (via drill 0.3 pad 0.15, 0.4 pad 0.15, 0.6 pad 0.15)  (1 unrouted)
  Top 0.2: U2.29 21.4,39.7 21.5,39.8 22.66,39.8 C13.1 | U2.54 8.9,40.25 9.4,39.75 U2.53
  Top 0.3: C28.1 6.9,39.9 | 8.9,40.25 6.95,40.25 6.65,39.95 C28.1 | C27.1 C28.1
  Top 0.5: C13.1 22.73,39.57 C26.1
  Top 0.7: v6.2,43.5 6.15,43.5 | 6.15,43.5 v5.4,43.5 v4.6,43.5 1.1,43.5 | 24.8,39.7 24.8,40.5 v25.1,40.8 v24,40.8 24.7,40.1 24.7,39.5 | R27.2 1.15,48.4 | 6.15,43.5 6.65,43 C27.1 | R19.2 3.42,6.7 3.4,6.7
  Bottom 0.7: v25.1,40.8 v24,40.8 22.4,40.8 21.6,40 21.6,37.9 21.3,37.6 11.5,37.6 11.3,37.8 11.3,38.8 6.6,43.5 v6.2,43.5 v5.4,43.5 v4.6,43.5
  other vias: 1.9,54.9 1.25,54.4 0.6,54.9 1.25,55.4 1.9,55.9 0.6,55.9 1.9,56.9 0.6,56.9 1.25,57.4 1.9,57.9 0.6,57.9 1.25,56.4 1.9,53.9 0.6,53.9 1.25,58.4 0.6,58.9 1.9,58.9
  pour Bottom (no thermals): 29.5,53.5 29.8,59.3 0.2,59.3 -0.1,53.5
  pour Top (no thermals): 5.3,0.2 0.2,0.2 0.2,59.3 2.2,59.3 2.2,8.4 5.3,5.3
Q4
  Top 0.2: Q4.4 18.18,55.27 R4.2
SN1  (via drill 0.3 pad 0.3)
  Top 0.2: Q4.3 15.56,55.2 14.4,55.2 14.37,55.23 Q4.2 14.34,55.3 13.2,55.3 13.18,55.27 Q4.1 | U2.33 v19.4,41.2 | R8.1 15.8,52 14.15,52 C5.1 | 13.4,52.75 C5.1 | C5.1 12.4,52.15 12.4,49.2 14.1,47.5 16.5,47.5 17.7,46.3 17.7,45.85 R31.1 15.9,44.05 15.9,41.7 v16.2,41.4 16.4,41.2 U2.39
  Bottom 0.2: v16.2,41.4 16.4,41.2 v19.4,41.2
  pour Top (no thermals): 12.8,55.85 12.75,55.8 12.75,53.85 12.8,53.8 13.9,53.8 14.1,53.6 14.1,52.7 14.5,52.3 17.1,52.3 17.15,52.35 17.15,53.85 16.7,54.3 16.45,54.3 16,54.75 16,55.8 15.95,55.85
SN2
  Top 0.2: Q6.2 24.36,53.66 R9.1 25.8,52 24.2,52 C6.1 22.45,52.15 22.45,47.55 23.9,46.1 23.9,45.6 | U2.34 18.9,38 19.2,37.7 20.1,37.7 20.4,38 U2.31 20.4,40.6 24.05,44.25 24.05,45.3 R33.1 23.9,45.6 | 23.9,45.6 24.1,45.4
  Top 0.5: Q6.3 Q6.2 Q6.1
  pour Top (no thermals): 22.8,55.85 22.75,55.8 22.75,53.85 22.8,53.8 23.9,53.8 24.1,53.6 24.1,52.7 24.5,52.3 27.1,52.3 27.15,52.35 27.15,53.85 26.7,54.3 26.45,54.3 26,54.75 26,55.8 25.95,55.85
SPI_!CS  (via drill 0.3 pad 0.15)
  Top 0.2: U1.20 23.48,20.4 23.2,20.4 21.7,21.9 21.7,22.1 19.1,24.7 19.1,25.2 18.9,25.4 v18.9,27.4 | U2.8 11.4,31.8 11.6,32 18.2,32 v18.3,32.1
  Bottom 0.2: v18.3,32.1 18.3,28 v18.9,27.4
SWDCLK  (via drill 0.3 pad 0.15)
  Top 0.2: v15.8,16.6 15.8,16.2 16.05,15.95 16.25,15.95 16.25,15.97 U1.37 | X2.4 10.7,6.55 9.85,7.4 7.7,7.4 7,8.1 7,11.7 7.4,12.1 13.6,12.1 14.9,13.4 14.9,13.9 v14,14.8
  Bottom 0.2: v15.8,16.6 v14,14.8
SWDIO  (via drill 0.3 pad 0.15)
  Top 0.2: X2.3 9.7,6.5 9.2,7 7.5,7 6.6,7.9 6.6,11.8 7.3,12.5 13.1,12.5 v14.3,13.7 | v18.1,17.5 18.1,18.6 U1.34
  Bottom 0.2: v14.3,13.7 v18.1,17.5
V_A_SENSE
  Top 0.2: R10.2 R11.2 25.35,30.85 25.6,30.6 25.6,25.6 25.35,25.35 C14.1 24.8,24 27.4,21.4 27.4,19.36 U1.13
V_B_SENSE
  Top 0.2: R12.2 R13.2 27.45,30.85 27.7,30.6 27.7,25.6 27.45,25.35 C15.1 26.9,23.7 28.4,22.2 28.4,16.4 27.8,15.8 27.26,15.8 U1.12
V_BUS_SENSE
  Top 0.2: U1.10 28.85,12.81 C17.1 R20.2 | R19.1 6.1,5.68 6.1,4.1 7.6,2.6 25.5,2.6 28.85,5.95 R20.2 | 28.9,5.98 R20.2
V_C_SENSE
  Top 0.2: R14.2 R15.2 28.45,30.85 28.2,30.6 28.2,25.6 28.45,25.35 C16.1 29,16.2 28.2,15.4 26.98,15.4 U1.11

## Text on the board
bNames: MODS | Spin v1